# Altium PCB sdram_shield.PcbDoc
Units mm, origin at the board's own origin, x right, y up, seen from the top; angles counter-clockwise.
Board outline 20.32 x 50.8 mm, 2 copper layers (Top Layer, Bottom Layer); 1 components, 1 nets, 34 pads, 0 vias.
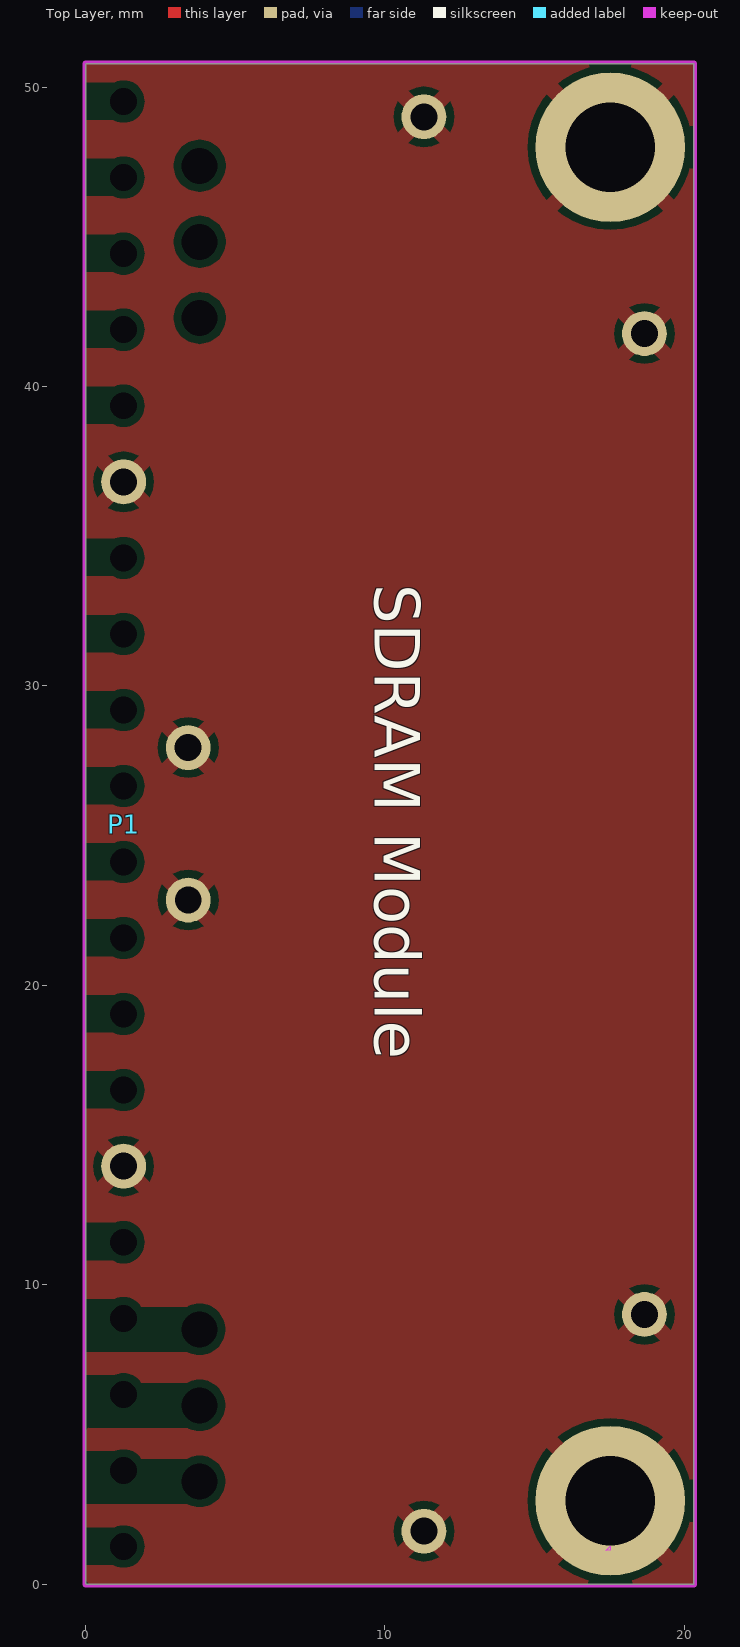
[diagram p0: Top Layer view]
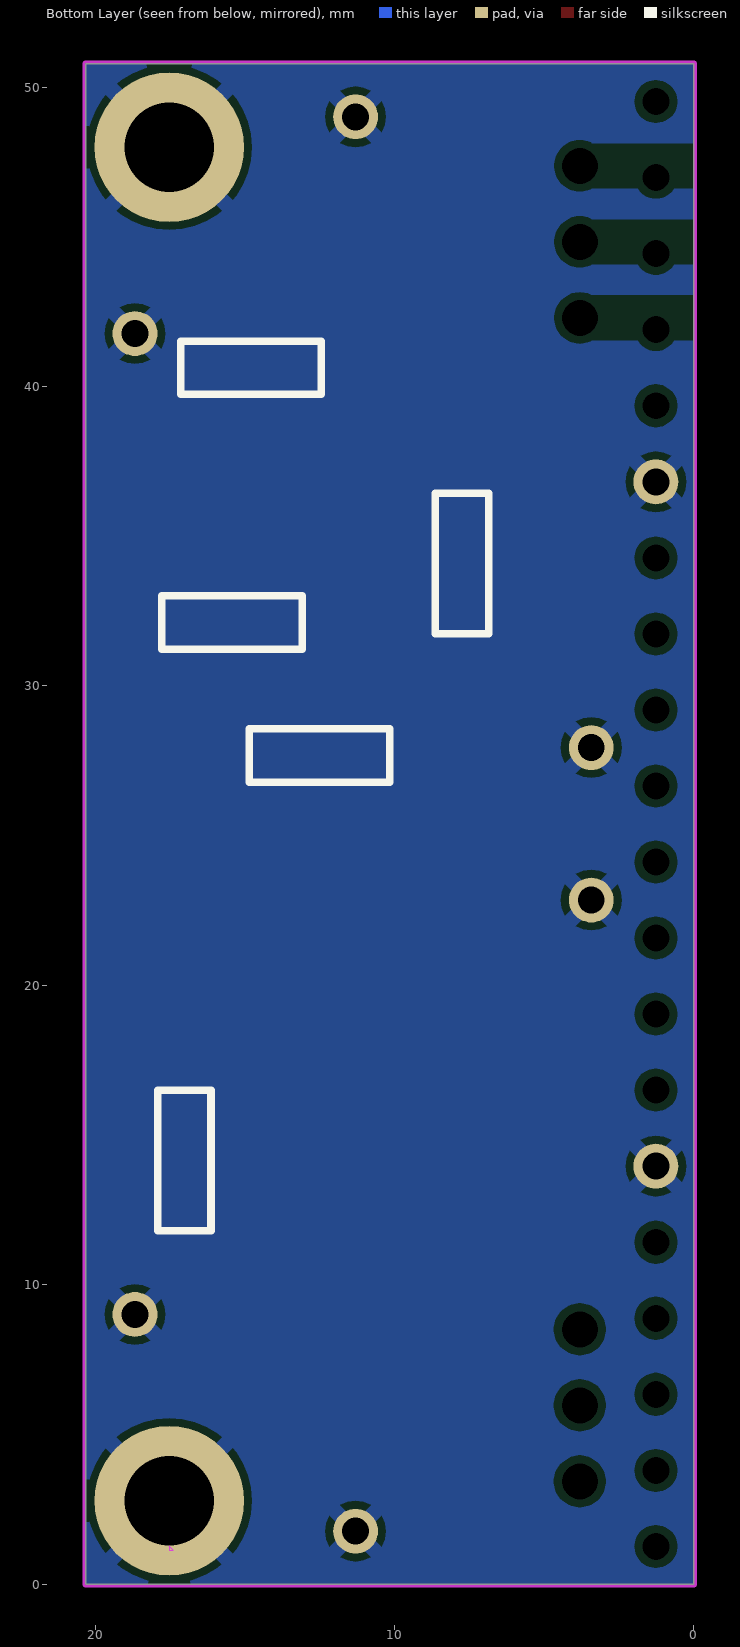
[diagram p1: Bottom Layer view, seen from below]

## Layer stack, top to bottom
Top Solder: solder mask 0.0102, Solder Resist, Dk 3.5
Top Layer: signal copper 0.0356
Dielectric 1: dielectric 0.32, FR-4, Dk 4.8
Bottom Layer: signal copper 0.0356
Bottom Solder: solder mask 0.0102, Solder Resist, Dk 3.5

## Board outline
0,50.788 0,-0.012 20.32,-0.012 20.32,50.788

## Design rules (kind name [scope] priority, off if disabled: settings)
BoardOutlineClearance [All] p1: gap=0 ignorepadtopadclearanceinfootprint=FALSE
Clearance keep-out_clearance [InNamedPolygon('ground') vs OnLayer('Keep-Out Layer')] p1: gap=0 ignorepadtopadclearanceinfootprint=FALSE
Clearance [All] p2: gap=0.254 ignorepadtopadclearanceinfootprint=TRUE except(0: Arc-Hole Track-Hole SMDPad-Hole THPad-Hole Via-Hole Fill-Hole Poly-Hole Region-Hole Text-Hole)
ComponentClearance [All] p1 off: gap=0.254 collisioncheckmode=3 verticalgap=0.254 showdistances=FALSE
Height [All] p1 off: minheight=0 maxheight=25.4 prefheight=12.7
HoleSize [All] p1: absolutevalues=TRUE maxlimit=6 minlimit=0.025 maxpercent=80.000 minpercent=20.000
MinimumSolderMaskSliver [All] p1: minsoldermaskwidth=0.25
PolygonConnect [All] p1: connectstyle=Relief reliefconductorwidth=0.508 reliefentries=4 polygonreliefangle="45 Angle" airgapwidth=0.254
RoutingVias [All] p1: holewidth=0.4 width=1 viastyle="Through Hole" minholewidth=0.4 minwidth=1 maxholewidth=0.4 maxwidth=1
SilkToSolderMaskClearance [IsPad] p1: minsilkscreentomaskgap=0.127 clearancetoexposedcopper=TRUE
SolderMaskExpansion SolderMaskExpansion_U1 [InComponent('U1')] p1: expansion=0
SolderMaskExpansion [All] p2: expansion=0.051
Width Width_power [InNetClass('power')] p1: maxlimit=2 minlimit=0.254 preferedwidth=0.508 minimp=50.000000 maximp=50.000000 favimp=50.000000
Width Width_signal [All] p2: maxlimit=0.254 minlimit=0.254 preferedwidth=0.254
25 further rules are at their usual default settings.

## Classes and differential pairs
net class power: GND

## Components (designator, comment, footprint, x,y, rotation, side; value= is the part's Value field where it differs from the comment)
P1 "Header 20" HDR1X20 1.27,1.258 r90 top locked

## Footprints (in the part's own frame and the unit in brackets; to place one, negate y for a bottom-side part, rotate by r counter-clockwise, add the part's x,y. Pads: shape width x height; smd on the part's side, far side on the other; paste and mask are expansions set on the pad)
HDR1X20 [mm] "Connector; Header; 20 Position"
  round 0 hole 0.9 unplated mask-0.9: 1(0,0) 2(2.54,0) 3(5.08,0) 4(7.62,0) 5(10.16,0) 7(15.24,0) 8(17.78,0) 9(20.32,0) 10(22.86,0) 11(25.4,0) 12(27.94,0) 13(30.48,0) 14(33.02,0) 16(38.1,0) 17(40.64,0) 18(43.18,0) 19(45.72,0) 20(48.26,0)
  round 1.5 hole 0.9: 6(12.7,0) 15(35.56,0)

## Part data
P1: "Header, 20-Pin", LatestRevisionDate=17-Jul-2002, LatestRevisionNote="Re-released for DXP Platform.", Publisher="Altium Limited"

## Free pads (board coordinates)
  round 1.5 hole 0.9: 8(18.669,9.005) ""(3.429,27.94) ""(3.429,22.848) ""(11.303,1.766) ""(11.303,49.01) ""(18.669,41.771)
  round 5 hole 3: M3(17.526,2.782) M3(17.526,47.994)
  round 0 hole 1.2 unplated mask-1.2: ""(3.81,3.429) ""(3.81,5.969) ""(3.81,8.509) ""(3.81,42.291) ""(3.81,44.831) ""(3.81,47.371)

## Nets (pads, with @x,y where several pads share a name; then routed paths per layer and width w, separated by ;. In a path a pad name is that pad's centre, name@x,y a point inside that pad or via, vN(x,y) a via of type N, cw(c..) or ccw(c..) an arc to the next point about the centre after c; other vN are vias at no path point)
GND: P1.6 P1.15 pad.8 pad.@3.429,22.848 pad.@3.429,27.94 pad.@11.303,1.766 pad.@11.303,49.01 pad.@18.669,41.771 pad.M3
pads on no net: P1.1 P1.2 P1.3 P1.4 P1.5 P1.7 P1.8 P1.9 P1.10 P1.11 P1.12 P1.13 P1.14 P1.16 P1.17 P1.18 P1.19 P1.20

## Polygon pours and split planes (outlines as drawn)
GND on Top Layer "ground" (solid, pour order 16): -0.05,48.895 1.27,48.895 1.27,50.165 -0.05,50.165 -0.05,50.8 20.308,50.8 20.32,50.788 20.32,0 -0.05,0 -0.05,0.635 1.27,0.635 1.27,1.905 -0.05,1.905 -0.05,2.667 3.81,2.667 3.81,4.191 1.27,4.191 1.27,4.445 -0.05,4.445 -0.05,5.215 3.81,5.2 3.81,6.731 1.27,6.731 1.27,6.985 -0.051,6.985 -0.048,7.747 3.81,7.747 3.81,9.271 1.27,9.271 1.27,9.525 -0.05,9.525 -0.05,10.795 1.27,10.795 1.27,12.08 -0.05,12.08 -0.05,15.875 1.27,15.875 1.27,17.145 -0.05,17.145 -0.05,18.415 1.27,18.415 1.27,19.685 -0.05,19.685 -0.05,20.955 1.27,20.955 1.27,22.225 -0.05,22.225 -0.05,23.495 1.27,23.495 1.27,24.765 -0.05,24.765 -0.05,26.035 1.27,26.035 1.27,27.305 -0.05,27.305 -0.05,28.575 1.27,28.575 1.27,29.845 -0.05,29.845 -0.05,31.115 1.27,31.115 1.27,32.385 -0.05,32.385 -0.05,33.655 1.27,33.655 1.27,34.925 -0.05,34.925 -0.05,38.735 1.27,38.735 1.27,40.005 -0.05,40.005 -0.05,41.275 1.27,41.275 1.27,42.545 -0.05,42.545 -0.05,43.815 1.27,43.815 1.27,45.085 -0.05,45.085 -0.05,46.355 1.27,46.355 1.27,47.625 -0.05,47.625
GND on Bottom Layer "ground" (solid, remove dead copper, pour order 8): 0,48.133 3.81,48.133 3.81,46.609 0,46.609 0,45.593 3.81,45.593 3.81,44.069 0,44.069 0,43.072 3.791,43.072 3.81,43.053 3.81,41.529 0,41.529 0,38.1 -0.05,38.1 -0.05,-0.062 20.32,-0.062 20.32,50.77 0,50.792

## Keep-outs
Keep-Out Layer:
  pour cut-out: 17.399,1.131 17.526,1.258 17.526,1.131
  lines w0.1: -0.05,-0.012 ccw(c0,-0.012) 0,-0.062 ; -0.05,-0.012 ccw(c0,-0.012) 0,-0.062 ; -0.05,-0.012 -0.05,50.788 ; -0.05,50.788 cw(c0,50.788) 0,50.838 ; -0.05,50.788 cw(c0,50.788) 0,50.838 ; 0,-0.062 20.32,-0.062 ; 0,50.838 20.32,50.838 ; 20.32,-0.062 ccw(c20.32,-0.012) 20.37,-0.012 ; 20.32,-0.062 ccw(c20.32,-0.012) 20.37,-0.012 ; 20.32,50.838 cw(c20.32,50.788) 20.37,50.788 ; 20.32,50.838 cw(c20.32,50.788) 20.37,50.788 ; 20.37,-0.012 20.37,50.788

## Silkscreen, mask and mechanical layers (free items; w line width, h text height)
Top Overlay:
  text "SDRAM Module" at 9.652,33.401 h1.52 r270
Bottom Overlay:
  lines w0.254: 6.858,31.738 8.636,31.738 8.636,36.437 6.858,36.437 6.858,31.738 ; 10.16,26.785 14.859,26.785 14.859,28.563 10.16,28.563 10.16,26.785 ; 12.446,39.739 17.145,39.739 17.145,41.517 12.446,41.517 12.446,39.739 ; 13.081,31.23 17.78,31.23 17.78,33.008 13.081,33.008 13.081,31.23 ; 16.129,11.799 17.907,11.799 17.907,16.498 16.129,16.498 16.129,11.799